# Altium PCB display.PcbDoc
Units mm, origin at the board's own origin, x right, y up, seen from the top; angles counter-clockwise.
Board outline 29.7 x 24.35 mm, 2 copper layers (Top Layer, Bottom Layer); 18 components, 17 nets, 86 pads, 107 vias.
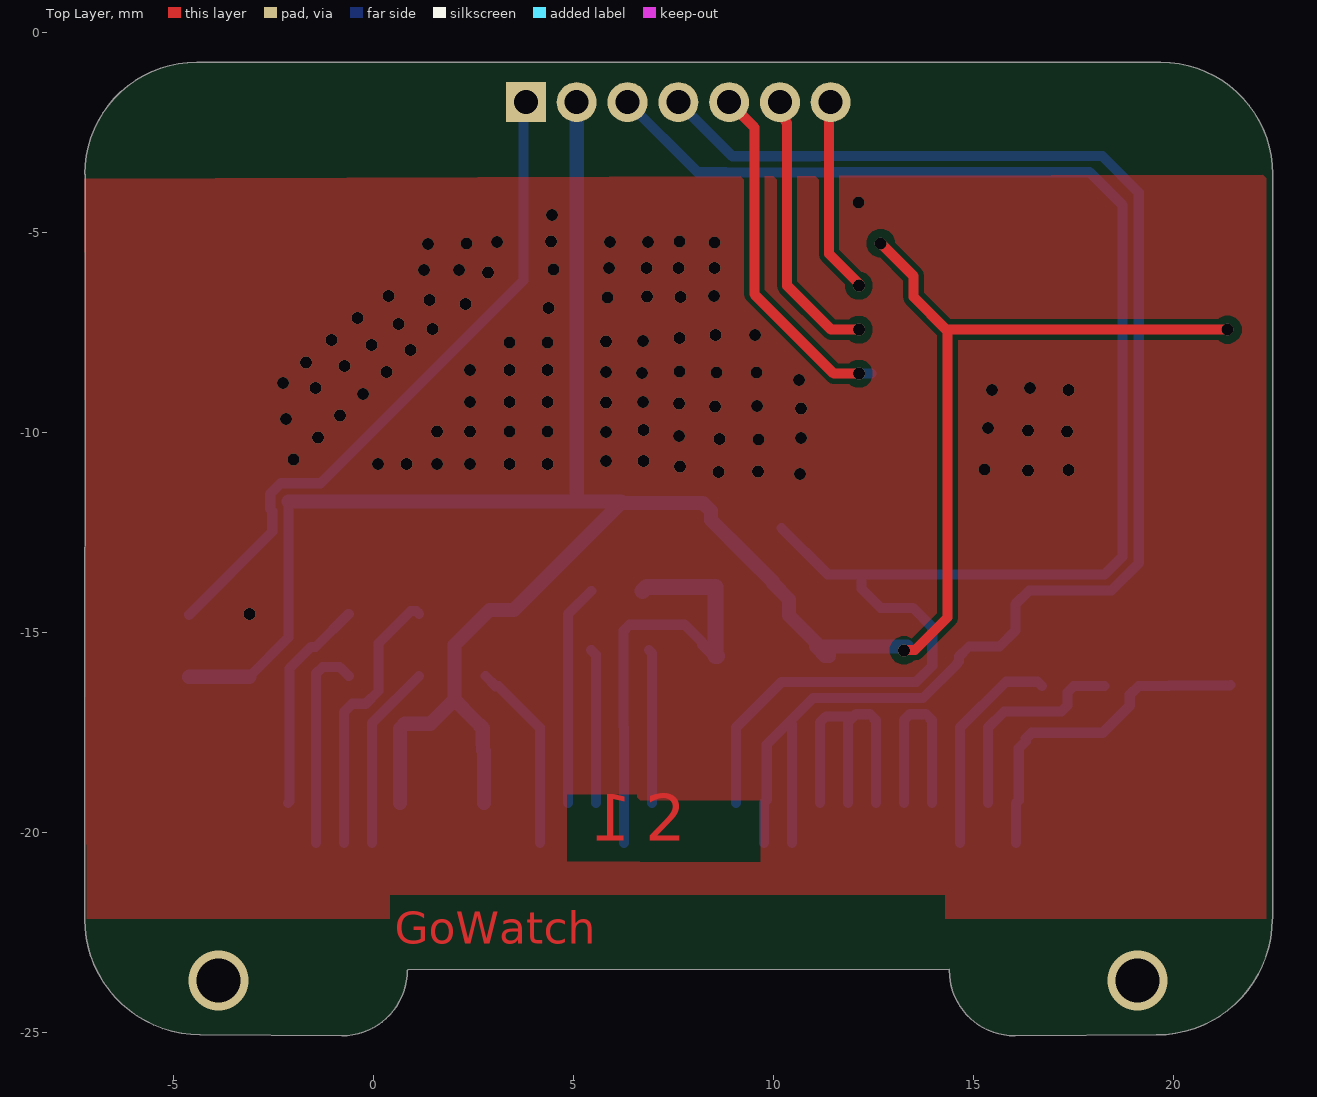
[diagram p0: Top Layer view]
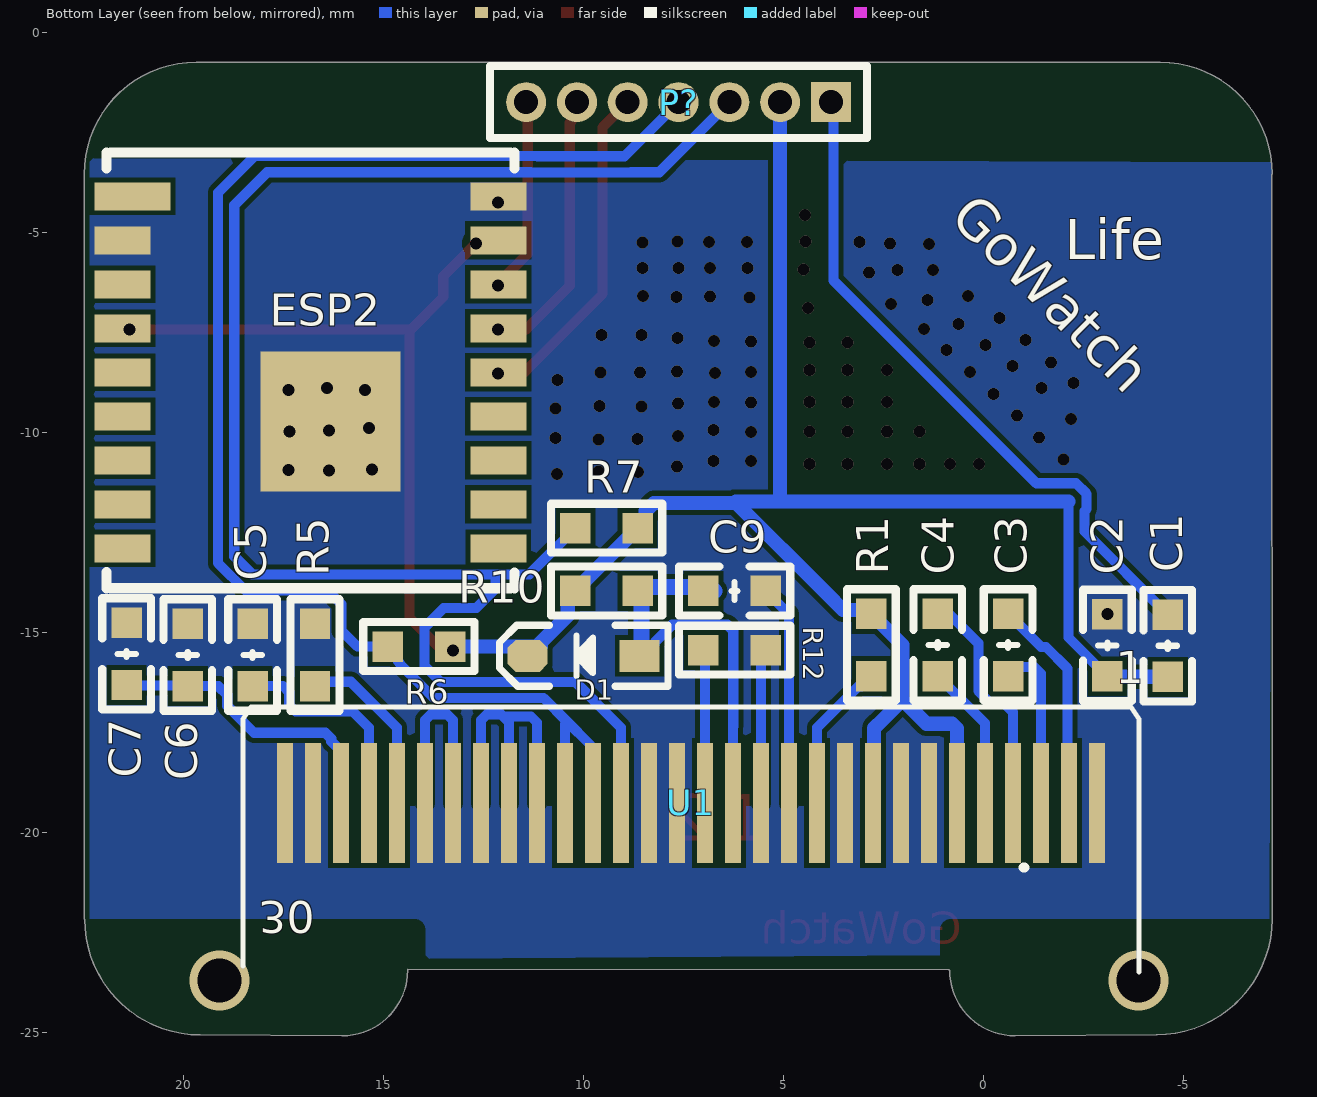
[diagram p1: Bottom Layer view, seen from below]
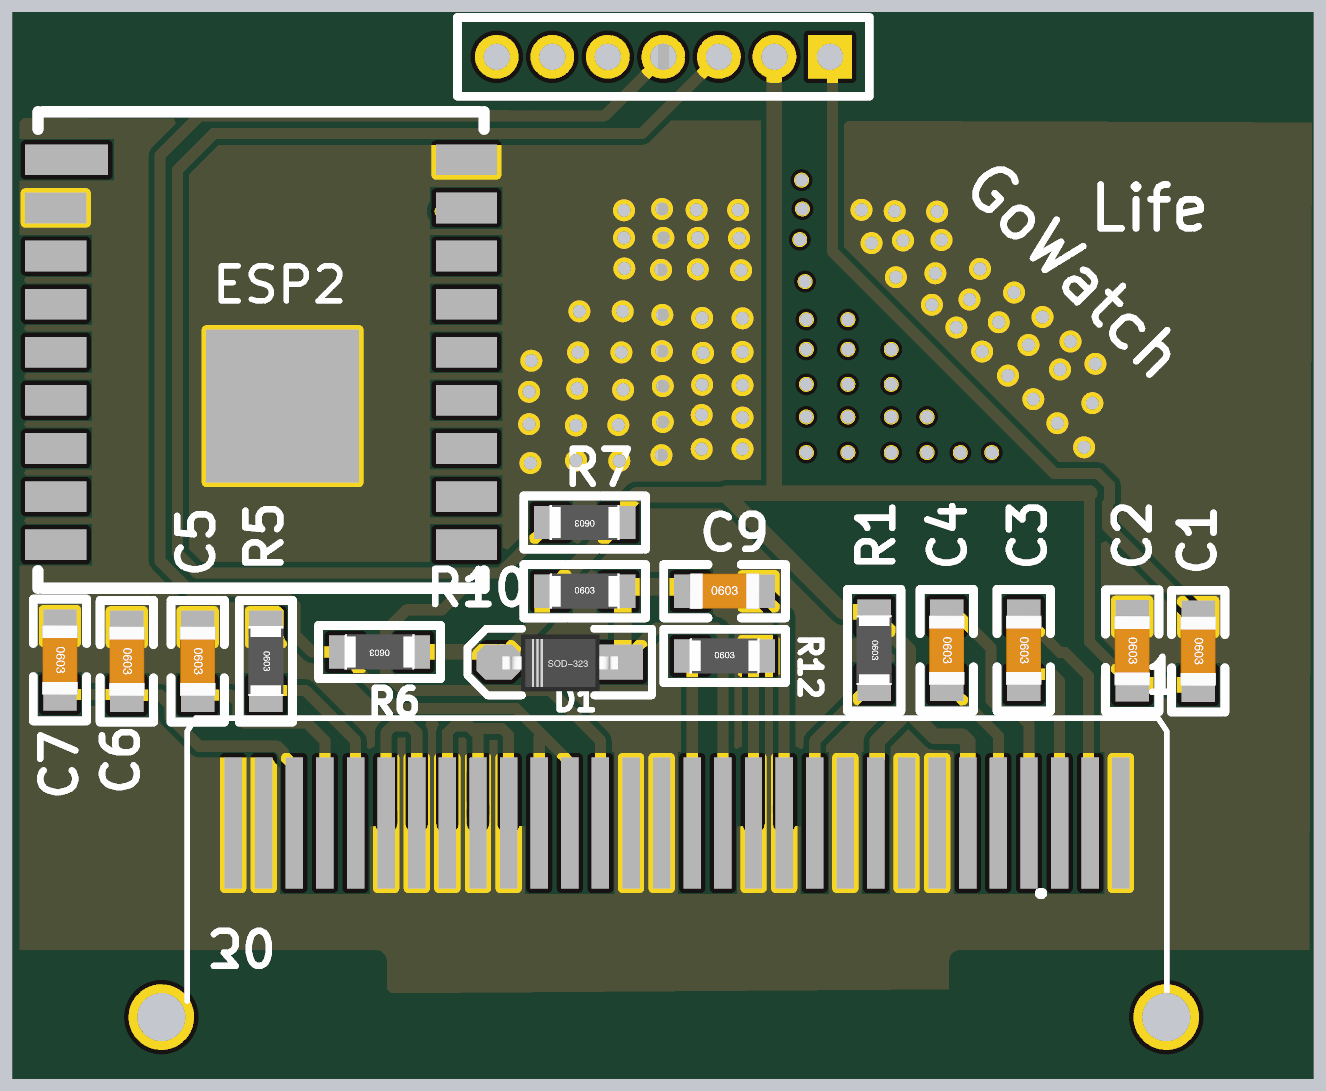
[diagram p2: 3D render of the assembled board from below, using the file's embedded part models]

## Layer stack, top to bottom
Top Solder: solder mask 0.0102, Solder Resist, Dk 3.5
Top Layer: signal copper 0.0356
Dielectric 1: dielectric 0.32, FR-4, Dk 4.8
Bottom Layer: signal copper 0.0356
Bottom Solder: solder mask 0.0102, Solder Resist, Dk 3.5

## Board outline
-7.211,-22.161 ccw(c-4.317,-22.161) -4.317,-25.056 -4.333,-25.056 -0.772,-25.083 -0.782,-25.083 ccw(c-0.782,-23.448) 0.853,-23.448 0.874,-23.43 14.406,-23.417 14.405,-23.448 ccw(c16.04,-23.448) 16.04,-25.083 16.05,-25.086 19.61,-25.059 19.583,-25.059 ccw(c19.583,-22.165) 22.478,-22.165 22.49,-22.16 22.49,-3.54 22.489,-3.54 ccw(c19.689,-3.54) 19.689,-0.74 19.685,-0.741 -4.401,-0.741 -4.411,-0.741 ccw(c-4.411,-3.541) -7.211,-3.541 -7.201,-3.541

## Design rules (kind name [scope] priority, off if disabled: settings)
Clearance [All] p1: gap=0.127 ignorepadtopadclearanceinfootprint=FALSE except(0.15: Arc-Arc Arc-Track Track-Track; 0.2: Arc-Via Track-Via SMDPad-Via THPad-Via Via-Fill Via-Poly Via-Region; 0.4: Via-Via)
ComponentClearance [All] p1: gap=0.127 collisioncheckmode=3 verticalgap=0.127 showdistances=FALSE
MinimumSolderMaskSliver [All] p1: minsoldermaskwidth=0.22
PolygonConnect [All] p1: connectstyle=Direct reliefconductorwidth=0.254 reliefentries=4 polygonreliefangle="90 Angle" airgapwidth=0.254
RoutingVias [All] p1: holewidth=0.711 width=1.27 viastyle="Through Hole" minholewidth=0.711 minwidth=1.27 maxholewidth=0.711 maxwidth=1.27
SolderMaskExpansion [All] p1: expansion=0.102 istentingtop=FALSE
Width [All] p1: maxlimit=3 minlimit=0.127 preferedwidth=0.254 minimp=50.000000 maximp=50.000000 favimp=50.000000
28 further rules are at their usual default settings.

## Components (designator, comment, footprint, x,y, rotation, side; value= is the part's Value field where it differs from the comment)
C1 "105" "C 0603_L" -4.601,-15.331 r270 bottom
C2 "225" "C 0603_L" -3.091,-15.321 r270 bottom
C3 "105" "C 0603_L" -0.61,-15.31 r270 bottom
C4 "105" "C 0603_L" 1.15,-15.31 r270 bottom
C5 "225" "C 0603_L" 18.279,-15.561 r270 bottom
C6 "225" "C 0603_L" 19.899,-15.561 r270 bottom
C7 "105" "C 0603_L" 21.429,-15.534 r270 bottom
C9 "106" "C 0603_L" 6.23,-13.96 r180 bottom
D1 "1N4148" SOD-323 10,-15.58 r0 bottom
ESP2 "ESP01F" ESP-01F 16.83,-7.15 r180 bottom
P? "MHDR1X7" MHDR1X7 3.82,-1.74 r0 bottom
R1 "4.7K" "R 0603_L" 2.81,-15.31 r270 bottom
R5 "560K" "R 0603_L" 16.719,-15.561 r270 bottom
R6 "4.7K" "R 0603_L" 14.12,-15.35 r0 bottom
R7 "4.7K" "R 0603_L" 9.43,-12.39 r0 bottom
R10 "4.7K" "R 0603_L" 9.43,-13.96 r180 bottom
R12 "4.7K" "R 0603_L" 6.23,-15.44 r180 bottom
U1 "1.3寸OLED，FPC线30pin" 0.96OLED-仅焊盘 -9.181,-18.361 r0 top

## Footprints (in the part's own frame and the unit in brackets; to place one, negate y for a bottom-side part, rotate by r counter-clockwise, add the part's x,y. Pads: shape width x height; smd on the part's side, far side on the other; paste and mask are expansions set on the pad)
0.96OLED-仅焊盘 [mm] "30PIN"
  rect 0.4x3 smd far side: 1(6.35,-0.9) 2(7.05,-0.9) 3(7.75,-0.9) 4(8.45,-0.9) 5(9.15,-0.9) 6(9.85,-0.9) 7(10.55,-0.9) 8(11.25,-0.9) 9(11.95,-0.9) 10(12.65,-0.9) 11(13.35,-0.9) 12(14.05,-0.9) 13(14.75,-0.9) 14(15.45,-0.9) 15(16.15,-0.9) 16(16.85,-0.9) 17(17.55,-0.9) 18(18.25,-0.9) 19(18.95,-0.9) 20(19.65,-0.9) 21(20.35,-0.9) 22(21.05,-0.9) 23(21.75,-0.9) 24(22.45,-0.9) 25(23.15,-0.9) 26(23.85,-0.9) 27(24.55,-0.9) 28(25.25,-0.9) 29(25.95,-0.9) 30(26.65,-0.9)
"C 0603_L" [mil] "无极性贴片电容"
  rect 30x30 smd: 1(-30.59,0) 2(30.59,0)
  silkscreen extent -55,-24 55,24, body extent -31,-16 31,16, height 32
ESP-01F [mm]
  rect 1.9x0.7 smd: 1(-4.445,3.054)
  rect 1.4x0.7 smd: 2(-4.695,1.954) 3(-4.695,0.854) 4(-4.695,-0.246) 5(-4.695,-1.346) 6(-4.695,-2.446) 7(-4.695,-3.546) 8(-4.695,-4.646) 9(-4.695,-5.746) 10(4.695,-5.746) 11(4.695,-4.646) 12(4.695,-3.546) 13(4.695,-2.446) 14(4.695,-1.346) 15(4.695,-0.246) 16(4.695,0.854) 17(4.695,1.954) 18(4.695,3.054)
  rect 3.5x3.5 smd: 19(0.493,-2.579)
  silkscreen extent -5.1,-6.75 5.1,4.15
MHDR1X7 [mm] "Connector; Header; 7 Position"
  rect 1x1 hole 0.6: 1(0,0)
  round 1 hole 0.6: 2(1.27,0) 3(2.54,0) 4(3.81,0) 5(5.08,0) 6(6.35,0) 7(7.62,0)
  silkscreen extent -0.9,-0.9 8.52,0.9
"R 0603_L" [mil] "1/10W贴片电阻"
  rect 30x30 smd: 1(-30.59,0) 2(30.59,0)
  silkscreen extent -55,-24 55,24, body extent -31,-16 31,16, height 16
SOD-323 [mm] "1.8x1.3X0.9mm（长宽高，不包括引脚）"
  rect 1x0.8 smd: 1(-1.4,0)
  oct 1x0.8 smd: 2(1.4,0)
  silkscreen extent -2.11,-0.76 2.11,0.76, body extent -1.34,-0.63 1.31,0.67, height 1

## Part data
C1 C2 C3 C4 C5 C6 C7 C9: library part C, "无极性贴片电容", BOM名称=无极性贴片电容, 学习资源=www.ooocke.com, 材质=X7R, 版权归属=源创客
D1: "高速开关二极管", BOM名称=高速开关二极管, 学习资源=www.ooocke.com, 版权归属=源创客
P?: "Header, 7-Pin", LatestRevisionDate=17-Jul-2002, LatestRevisionNote="Re-released for DXP Platform.", Publisher="Altium Limited"
R1 R5 R6 R7 R10 R12: library part R, "贴片电阻", BOM名称=贴片电阻, 学习资源=www.ooocke.com, 版权归属=源创客

## Via types
v1: diameter 0.3, hole 0.3, Top Layer to Bottom Layer, 105 vias
v2: diameter 1.5, hole 1.1, Top Layer to Bottom Layer, 2 vias

## Nets (pads, with @x,y where several pads share a name; then routed paths per layer and width w, separated by ;. In a path a pad name is that pad's centre, name@x,y a point inside that pad or via, vN(x,y) a via of type N, cw(c..) or ccw(c..) an arc to the next point about the centre after c; other vN are vias at no path point)
+3.3V: C1.2 C2.2 D1.2 ESP2.4 ESP2.17 P?.2 R1.1 R6.1 R7.1 R10.1 U1.6 U1.9 | length 66.4
  Top Layer w0.254: v1(12.69,-5.27) 13.512,-6.092 13.512,-6.612 14.326,-7.426 17.857,-7.426 v1(21.36,-7.426) ; v1(13.27,-15.446) 13.278,-15.437 13.547,-15.437 14.36,-14.624 14.36,-7.439 14.373,-7.426
  Bottom Layer w0.254: C2.2 -2.118,-15.125 -2.118,-11.722
  Bottom Layer w0.354: C1.2 -4.596,-16.103 -3.096,-16.103 C2.2 ; -2.118,-11.722 5.09,-11.722 ; U1.6 0.669,-17.401 0.79,-17.28 1.43,-17.28 2.03,-16.68 ; U1.9 2.769,-17.961 2.746,-17.938 2.746,-17.788 2.741,-17.784 2.741,-17.391 2.523,-17.173 2.03,-16.68 ; P?.2@5.09,-1.677 5.09,-11.722 ; 6.191,-11.722 5.09,-11.722 ; D1.2 11.3,-15.58 11.07,-15.35 11.4,-15.35 R6.1 ; D1.2@11.4,-15.572 11.389,-15.572 11.124,-15.308 11.124,-15.296 10.4,-14.572 10.4,-14.173 9.993,-13.766 9.993,-13.73 9.366,-13.103 8.449,-12.186 8.449,-11.964 8.242,-11.757 6.191,-11.757 3.918,-14.03 3.515,-14.433 2.91,-14.433 2.03,-15.313 2.03,-16.68
ESP_RST: ESP2.16 P?.7 | length 4.9
  Top Layer w0.254: P?.7 11.398,-1.782 11.398,-5.533 12.134,-6.269 12.134,-6.319 v1(12.142,-6.328)
ESP_RXD: ESP2.15 P?.6 | length 6.9
  Top Layer w0.254: P?.6 10.313,-1.883 10.313,-2.225 10.349,-2.262 10.349,-6.328 11.449,-7.428 v1(12.142,-7.428)
ESP_TXD: ESP2.14 P?.5 | length 8.8
  Top Layer w0.254: P?.5 9.53,-2.37 9.53,-6.54 11.518,-8.528 v1(12.142,-8.528)
  Bottom Layer w0.254: v1(12.142,-8.528) ESP2.14@12.453,-8.528
GND: C1.1 C2.1 C5.1 C6.1 C7.1 C9.2 ESP2.2 ESP2.18 ESP2.19 P?.1 R5.1 R12.2 U1.1 U1.7 U1.8 U1.10 U1.12 U1.13 U1.16 U1.17 U1.21 U1.22 U1.23 U1.24 U1.25 U1.29 U1.30 | length 39.4
  Bottom Layer w0.254: C1.1 -2.522,-12.475 -2.522,-11.96 -2.572,-11.91 -2.572,-11.534 -2.306,-11.268 -1.315,-11.268 3.76,-6.193 P?.1@3.76,-1.402 ; U1.12 4.869,-14.544 C9.2 ; R12.2 5.569,-15.556 U1.13 ; U1.21 11.169,-17.249 11.318,-17.1 11.927,-17.1 11.969,-17.142 ; U1.22 11.869,-17.242 11.969,-17.142 ; U1.23 12.569,-17.191 12.42,-17.042 12.069,-17.042 11.969,-17.142 ; U1.24 13.269,-17.191 13.418,-17.042 13.82,-17.042 13.969,-17.191 U1.25
  other v1: -3.095,-14.541 10.67,-11.03 8.638,-10.98 9.627,-10.973 16.372,-10.954 15.29,-10.92 17.38,-10.93 7.673,-10.851 0.12,-10.79 0.84,-10.79 1.6,-10.79 2.42,-10.79 3.41,-10.79 4.36,-10.79 5.82,-10.71 6.753,-10.711 -1.99,-10.67 8.66,-10.159 9.63,-10.17 10.7,-10.14 -1.38,-10.119 7.643,-10.091 1.6,-9.976 2.42,-9.976 3.41,-9.976 4.36,-9.976 5.82,-9.99 17.352,-9.974 6.753,-9.931 16.372,-9.944 15.37,-9.88 -2.18,-9.66 -0.83,-9.57 10.7,-9.4 8.55,-9.353 9.6,-9.33 7.643,-9.271 5.82,-9.25 6.743,-9.241 2.42,-9.23 3.41,-9.23 4.36,-9.23 -0.25,-9.03 15.47,-8.94 17.38,-8.93 -1.44,-8.89 16.42,-8.88 -2.25,-8.76 10.65,-8.69 6.723,-8.511 8.59,-8.5 9.58,-8.5 0.34,-8.48 5.82,-8.49 7.663,-8.471 2.42,-8.43 3.41,-8.43 4.36,-8.43 -0.72,-8.33 -1.68,-8.25 0.93,-7.93 -0.04,-7.81 3.41,-7.75 4.36,-7.75 5.82,-7.72 6.743,-7.711 -1.04,-7.69 7.653,-7.641 8.56,-7.56 9.55,-7.56 1.49,-7.41 0.63,-7.29 -0.39,-7.13 4.39,-6.88 2.313,-6.781 1.41,-6.69 5.853,-6.621 6.843,-6.601 7.683,-6.611 0.39,-6.59 8.523,-6.581 2.87,-6 2.15,-5.94 1.27,-5.93 4.51,-5.92 5.9,-5.89 6.84,-5.88 7.63,-5.88 8.53,-5.88 1.37,-5.28 2.34,-5.27 8.53,-5.25 3.1,-5.24 5.92,-5.24 6.87,-5.24 4.45,-5.22 7.66,-5.22 4.47,-4.56 12.14,-4.246
NetC3_1: C3.1 U1.2 | length 5.4
  Bottom Layer w0.254: U1.2 -2.09,-19.22 -2.09,-15.896 -1.556,-15.362 -1.439,-15.362 C3.1
NetC3_2: C3.2 U1.3 | length 6.2
  Bottom Layer w0.254: C3.2 -0.837,-15.86 -1.262,-15.86 -1.431,-16.029 U1.3 ; U1.3 -1.431,-20.261 U1.3
NetC4_1: C4.1 U1.4 | length 7.9
  Bottom Layer w0.254: C4.1 1.08,-14.463 0.94,-14.463 0.135,-15.268 0.135,-16.463 -0.183,-16.781 -0.523,-16.781 -0.731,-16.989 U1.4 ; U1.4 -0.731,-20.261 U1.4
NetC4_2: C4.2 U1.5 | length 5.7
  Bottom Layer w0.254: C4.2 -0.031,-17.268 U1.5 ; U1.5 -0.031,-20.261 U1.5
NetC5_2: C5.2 U1.27 | length 5.4
  Bottom Layer w0.254: U1.27 15.369,-17.38 15.776,-16.973 17.205,-16.973 17.361,-16.817 17.361,-16.494 17.517,-16.338 C5.2
NetC6_2: C6.2 C7.2 U1.28 | length 9.5
  Bottom Layer w0.256: C7.2 21.415,-16.325 19.912,-16.325 C6.2 19.133,-16.338 18.915,-16.556 18.915,-16.835 18.244,-17.506 16.463,-17.506 16.314,-17.655 16.314,-17.716 16.141,-17.889 16.141,-19.189 U1.28 ; U1.28 16.069,-20.261 U1.28
NetC9_1: C9.1 D1.1 R10.2 U1.14 | length 11.7
  Bottom Layer w0.254: U1.14@6.269,-20.261 U1.14 6.269,-17.359 6.262,-17.352 6.262,-14.954 6.411,-14.805 7.787,-14.805 8.227,-15.245 8.227,-15.307 8.5,-15.58 D1.1@8.562,-15.58
  Bottom Layer w0.4: C9.1@6.734,-13.96 6.834,-13.86 8.562,-13.86 8.562,-15.58 D1.1
NetR1_2: R1.2 U1.11 | length 5.8
  Bottom Layer w0.254: R1.2 3.064,-16.341 3.13,-16.341 4.169,-17.38 U1.11 ; U1.11 4.169,-20.261 U1.11
NetR5_2: R5.2 U1.26 | length 6.5
  Bottom Layer w0.254: R5.2 16.609,-16.228 15.821,-16.228 14.669,-17.38 U1.26 ; U1.26 14.669,-20.261 U1.26
NetR12_1: R12.1 U1.15 | length 3.9
  Bottom Layer w0.254: R12.1@6.897,-15.44 6.969,-15.512 U1.15
SCL: P?.3 R7.2 U1.18 | length 42.4
  Bottom Layer w0.254: P?.3 8.112,-3.492 8.811,-3.492 8.813,-3.494 11.327,-3.494 11.33,-3.492 17.912,-3.492 18.738,-4.318 18.738,-13.096 18.288,-13.546 12.208,-13.546 ; U1.18 9.069,-17.38 10.215,-16.234 13.58,-16.234 13.978,-15.836 13.978,-14.864 13.499,-14.384 12.687,-14.384 12.208,-13.905 12.208,-13.546 ; R7.2 11.363,-13.546 12.208,-13.546
SDA: P?.4 R6.2 U1.19 U1.20 | length 38.8
  Bottom Layer w0.254: P?.4 8.98,-3.09 11.16,-3.09 11.162,-3.088 18.229,-3.088 19.142,-4.001 19.142,-13.264 18.456,-13.95 16.4,-13.95 16.057,-14.293 16.057,-14.952 15.659,-15.35 R6.2 14.643,-15.604 14.643,-15.717 14.608,-15.753 14.608,-15.778 13.748,-16.638 11.002,-16.638 10.409,-17.231 9.842,-17.798 9.842,-19.188 U1.19 U1.19@9.769,-20.261 ; U1.20@10.469,-20.261 U1.20 10.469,-17.291
pads on no net: ESP2.1 ESP2.3 ESP2.5 ESP2.6 ESP2.7 ESP2.8 ESP2.9 ESP2.10 ESP2.11 ESP2.12 ESP2.13
copper on no net:
  other v2: -3.87,-23.7 19.11,-23.7

## Polygon pours and split planes (outlines as drawn)
GND on Bottom Layer "GND_L02_P000" (solid, remove dead copper, pour order 0): -7.203,-3.241 22.353,-3.139 22.353,-23.213 -7.14,-23.007
GND on Top Layer "GND_L01_P002" (solid, remove dead copper, pour order 2): -7.225,-3.651 22.33,-3.549 22.33,-22.878 -7.164,-22.672

## Other copper
Top Layer:
  text "1" at 6.46,-20.59 h2
  text "2" at 6.799,-20.597 h2
  text "GoWatch" at 0.545,-22.78 h0.8

## Silkscreen, mask and mechanical layers (free items; w line width, h text height)
Bottom Overlay:
  lines w0.254: -1.021,-20.871 -0.991,-20.871
  text "GoWatch" at 0.87,-4.66 h1 r45
  text "Life" at -2.03,-5.67 h1
  text "1" at -3.3,-16.27 h0.8
Top Paste:
  lines w0.254: -7.161,-21.271 22.42,-21.271 ; 7.629,-21.271 7.629,-0.741
Top Solder:
  text "1" at 6.479,-20.577 h2
  text "2" at 6.84,-20.59 h2
  text "GoWatch" at 0.495,-22.83 h0.8
Mechanical 1:
  lines w0.1: -7.211,-22.161 ccw(c-4.317,-22.161) -4.317,-25.056 ; -7.211,-3.541 cw(c-4.411,-3.541) -4.411,-0.741 ; -7.201,-22.162 -7.201,-3.541 ; -4.401,-0.741 19.685,-0.741 19.699,-0.74 ; -4.333,-25.056 -0.772,-25.083 ; -0.782,-25.083 ccw(c-0.782,-23.448) 0.853,-23.448 ; 0.874,-23.43 14.406,-23.417 ; 14.405,-23.448 ccw(c16.04,-23.448) 16.04,-25.083 ; 16.05,-25.086 19.61,-25.059 ; 19.583,-25.059 ccw(c19.583,-22.165) 22.478,-22.165 ; 19.689,-0.74 cw(c19.689,-3.54) 22.489,-3.54 ; 22.49,-22.16 22.49,-3.54

## Text inside footprints (layer, text, board x,y; h text height)
U1: Bottom Overlay "30" at 18.12,-21.72 h0.8 r180